# Altium PCB PCB1.PcbDoc
Units mm, origin at the board's own origin, x right, y up, seen from the top; angles counter-clockwise.
Board outline 125.1 x 125.73 mm, 2 copper layers (Top Layer, Bottom Layer); 25 components, 28 nets, 163 pads, 0 vias.
Unrouted connection lines stored in the file: 1.
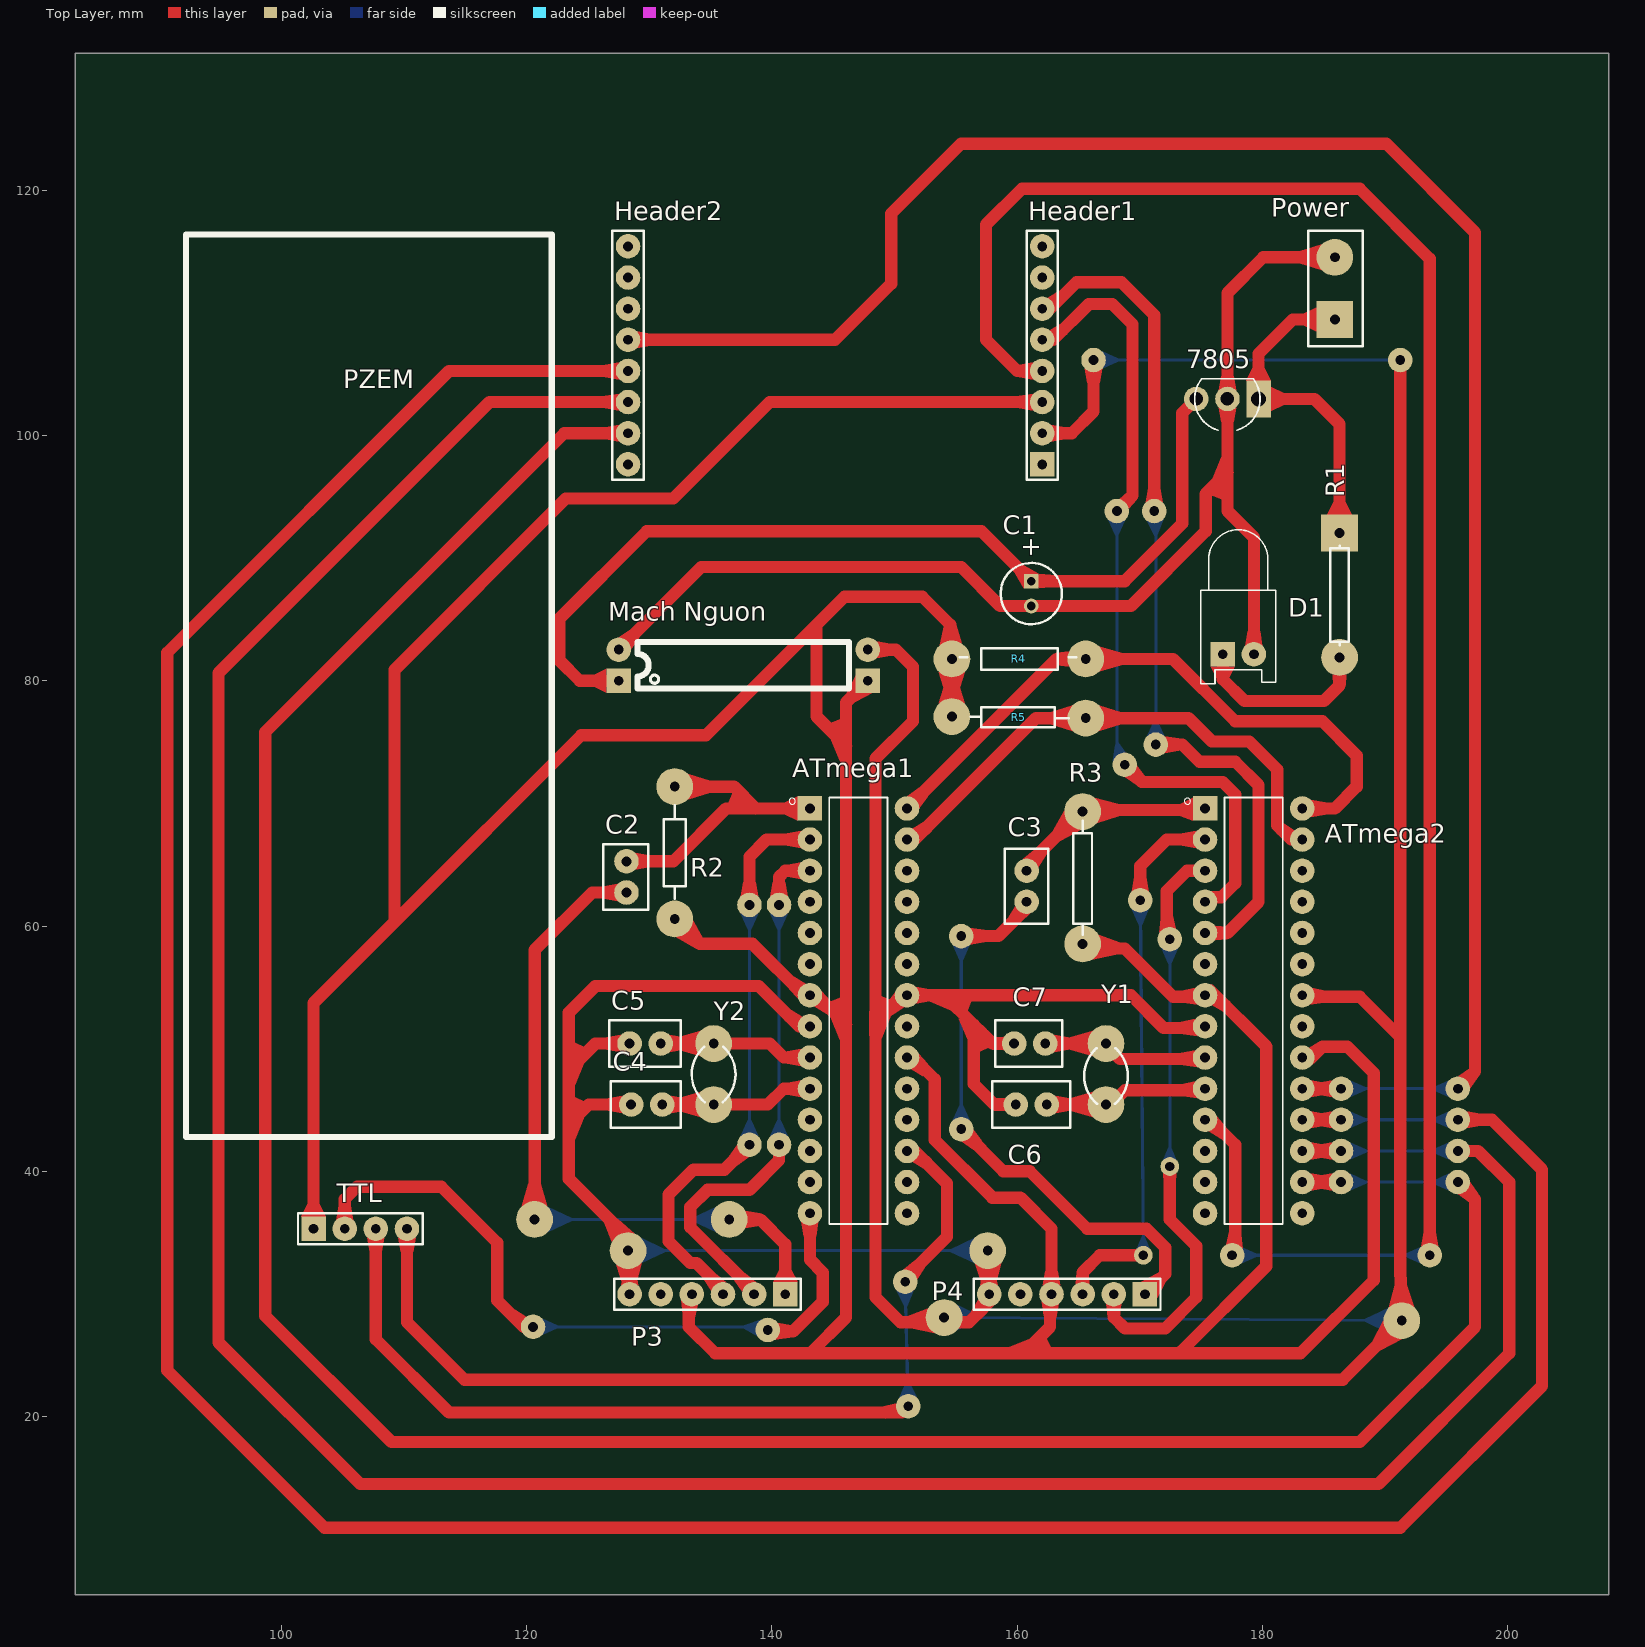
[diagram p0: Top Layer view]
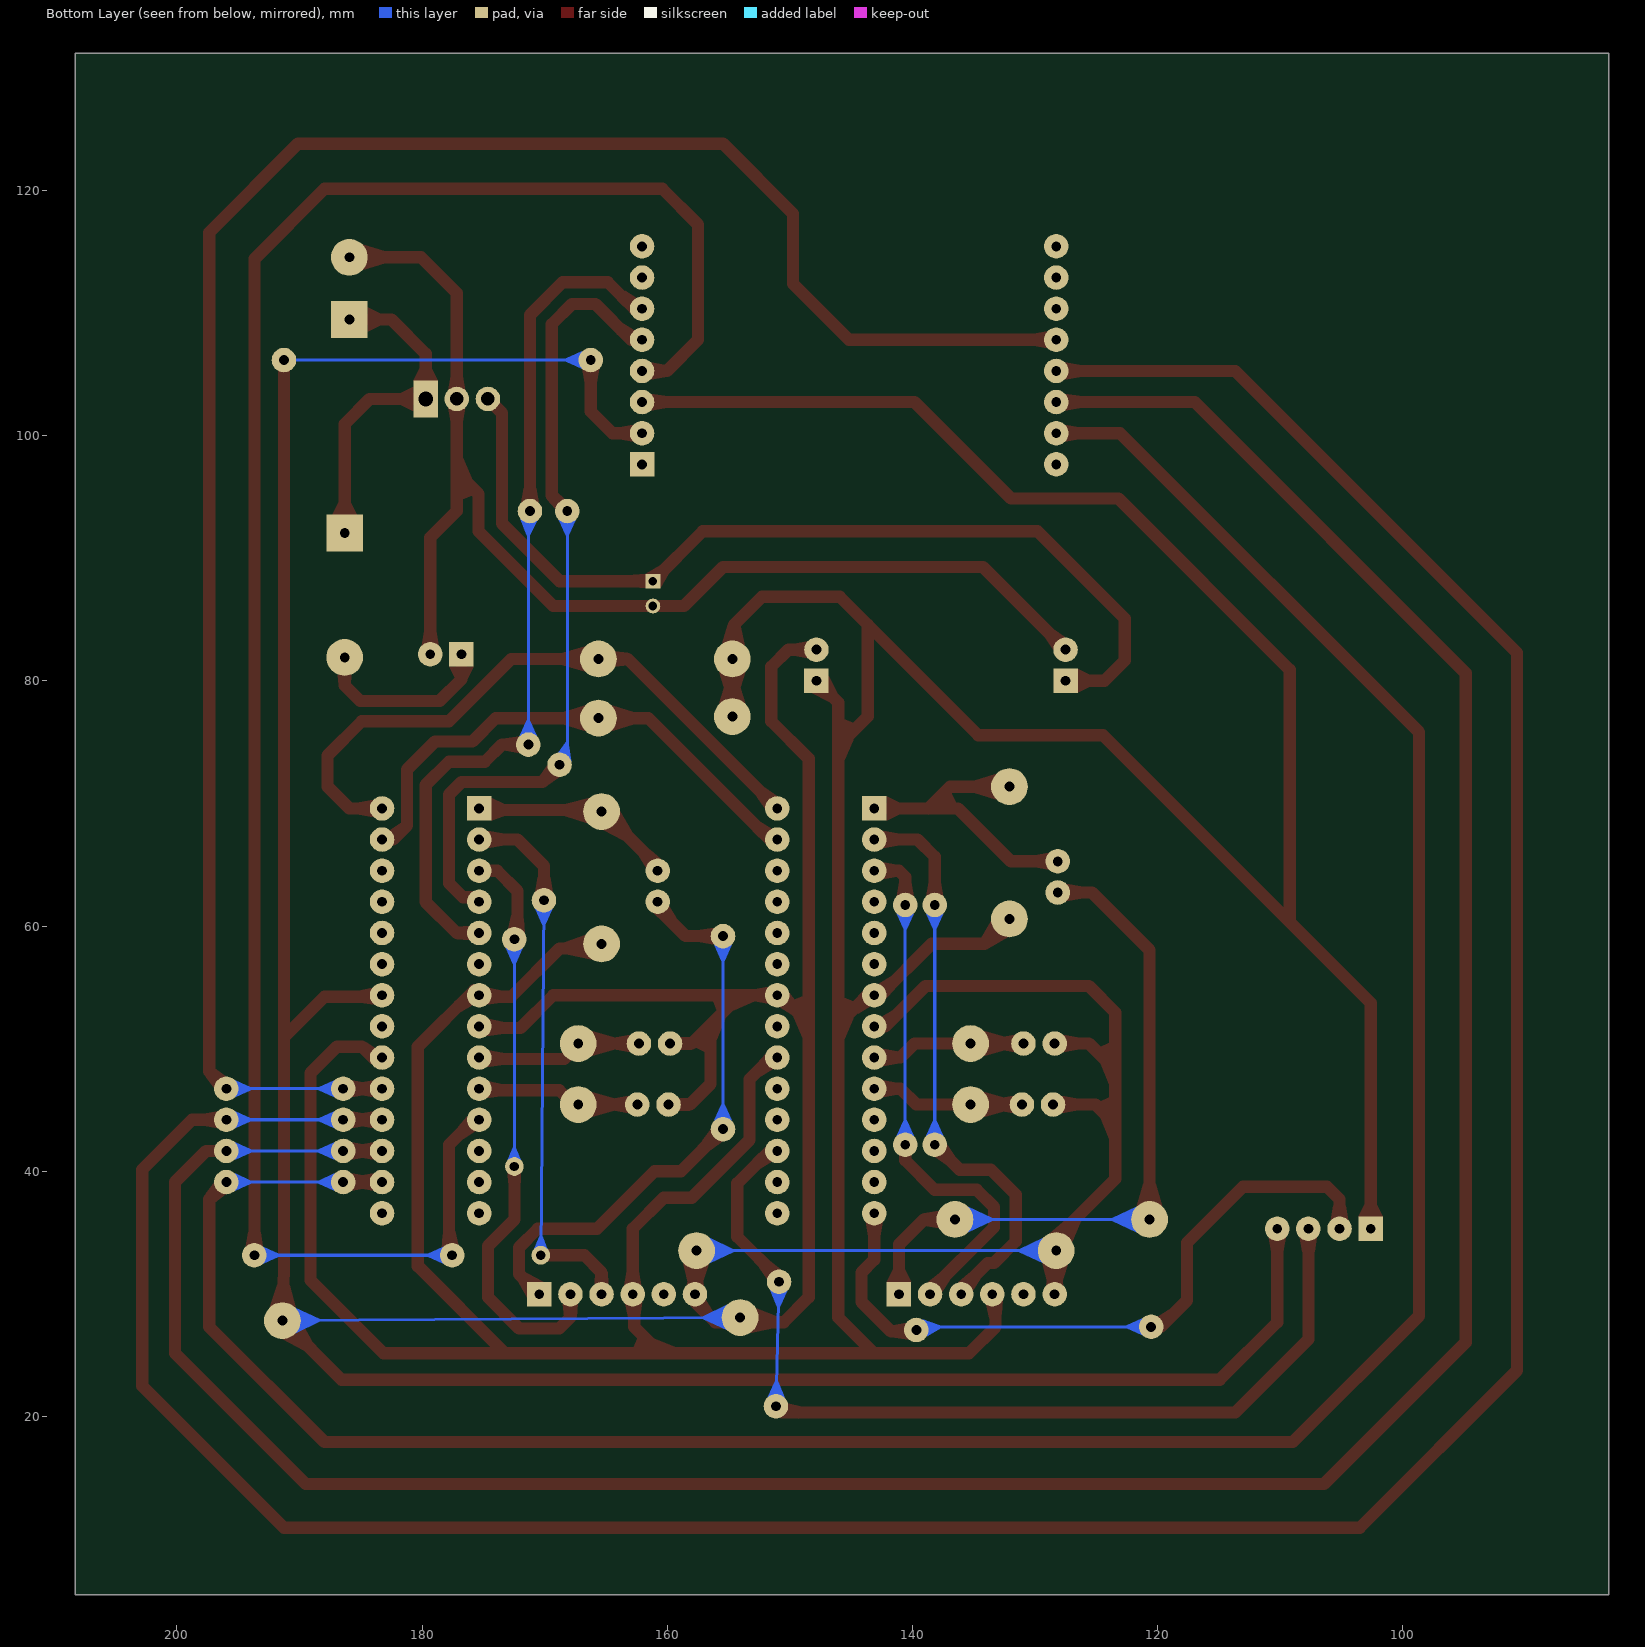
[diagram p1: Bottom Layer view, seen from below]

## Layer stack, top to bottom
Top Solder: solder mask 0.0102, Solder Resist, Dk 3.5
Top Layer: signal copper 0.0356
Dielectric 1: dielectric 0.32, FR-4, Dk 4.8
Bottom Layer: signal copper 0.0356
Bottom Solder: solder mask 0.0102, Solder Resist, Dk 3.5

## Board outline
83.185,5.461 208.28,5.461 208.28,19.558 208.28,131.191 83.185,131.191 83.185,127.762

## Design rules (kind name [scope] priority, off if disabled: settings)
Clearance [All] p1: gap=0.3 ignorepadtopadclearanceinfootprint=FALSE
PolygonConnect [All] p1: connectstyle=Relief reliefconductorwidth=0.254 reliefentries=4 polygonreliefangle="90 Angle" airgapwidth=0.254
RoutingVias [All] p1: holewidth=0.711 width=1.27 viastyle="Through Hole" minholewidth=0.711 minwidth=1.27 maxholewidth=0.711 maxwidth=1.27
SolderMaskExpansion [All] p1: expansion=0.102
Width [All] p1: maxlimit=1 minlimit=0.254 preferedwidth=1
30 further rules are at their usual default settings.

## Components (designator, comment, footprint, x,y, rotation, side; value= is the part's Value field where it differs from the comment)
7805 "LM7805" TO92- 177.165,102.997 r180 top (schematic designator U1)
ATmega1 "ATmega328P" DIP794W46P254L2967H457Q28B 147.066,53.086 r0 top
ATmega2 "ATmega328P" DIP794W46P254L2967H457Q28B 179.301,53.086 r0 top
C1 "Cap Pol1" RB7.6-15 161.163,86.995 r90 top value=10uF
C2 "Cap" RAD-0.3#1 128.143,66.548 r270 top value=100nF
C3 "Cap3" RAD-0.3#2 160.655,61.722 r270 top value=100nF
C4 "Cap" RAD-0.3#3 131.699,45.44 r0 top value=22pF
C5 "Cap" RAD-0.3#4 132.207,50.419 r0 top value=22pF
C6 "Cap" RAD-0.3#4 163.703,45.44 r0 top value=22pF
C7 "Cap" RAD-0.3#5 163.83,50.419 r0 top value=22pF
D1 "LED0" LED-0 178.054,82.169 r180 top
Header1 "" HDR1X8#1 162.052,97.663 r90 top
Header2 "" HDR1X8#2 128.27,97.663 r90 top
"Mach Nguon" "Mach Nguon 3.3V" PCBComponent_1 146.177,77.47 r90 top
P3 "FT232RL1" HDR1X6 141.097,29.972 r180 top
P4 "FT232RL2" HDR1X6 170.434,29.972 r180 top
Power "12-15 (V)" HDR1X2 185.928,112.141 r270 top (schematic designator P1)
R1 "Res1" AXIAL-0.3#1 186.309,88.265 r90 top value=470
R2 "Res1" AXIAL-0.3#2 132.08,67.564 r270 top value=10K
R3 "Res1" AXIAL-0.3#3 165.354,64.135 r270 top value=10K
R4 "Res1" AXIAL-0.3#4 158.496,81.915 r0 top value=10K
R5 "Res1" AXIAL-0.3#5 160.528,77.089 r0 top value=10K
TTL "Header 4" HDR1X4 102.616,35.306 r0 top (schematic designator P2)
Y1 "16 MHz" R38 167.259,46.99 r0 top
Y2 "16 MHz" R38 135.255,46.99 r0 top

## Footprints (in the part's own frame and the unit in brackets; to place one, negate y for a bottom-side part, rotate by r counter-clockwise, add the part's x,y. Pads: shape width x height; smd on the part's side, far side on the other; paste and mask are expansions set on the pad)
AXIAL-0.3#1 [mm] "Axial Device, Thru-Hole; 2 Leads; 0.3 in Pin Spacing"
  round 3 hole 0.8: 1(-6.35,0)
  rect 3x3 hole 0.8: 2(3.81,0)
  silkscreen extent -5.36,-0.76 2.77,0.76
AXIAL-0.3#2 [mm] "Axial Device, Thru-Hole; 2 Leads; 0.3 in Pin Spacing"
  round 3 hole 0.8: 1(-3.81,0) 2(6.985,0)
  silkscreen extent -2.29,-0.89 5.33,0.89
AXIAL-0.3#3 [mm] "Axial Device, Thru-Hole; 2 Leads; 0.3 in Pin Spacing"
  round 3 hole 0.8: 1(-5.207,0) 2(5.588,0)
  silkscreen extent -4.44,-0.76 4.83,0.76
AXIAL-0.3#4 [mm] "Axial Device, Thru-Hole; 2 Leads; 0.3 in Pin Spacing"
  round 3 hole 0.8: 1(-3.81,-0.127) 2(7.112,-0.127)
  silkscreen extent -3.17,-1.02 6.35,0.76
AXIAL-0.3#5 [mm] "Axial Device, Thru-Hole; 2 Leads; 0.3 in Pin Spacing"
  round 3 hole 0.8: 1(-5.842,0) 2(5.08,-0.127)
  silkscreen extent -4.32,-0.89 3.68,0.76
DIP794W46P254L2967H457Q28B [mm]
  rect 2x2 hole 0.8: 1(-3.96,16.51)
  round 2 hole 0.8: 2(-3.96,13.97) 3(-3.96,11.43) 4(-3.96,8.89) 5(-3.96,6.35) 6(-3.96,3.81) 7(-3.96,1.27) 8(-3.96,-1.27) 9(-3.96,-3.81) 10(-3.96,-6.35) 11(-3.96,-8.89) 12(-3.96,-11.43) 13(-3.96,-13.97) 14(-3.96,-16.51) 15(3.96,-16.51) 16(3.96,-13.97) 17(3.96,-11.43) 18(3.96,-8.89) 19(3.96,-6.35) 20(3.96,-3.81) 21(3.96,-1.27) 22(3.96,1.27) 23(3.96,3.81) 24(3.96,6.35) 25(3.96,8.89) 26(3.96,11.43) 27(3.96,13.97) 28(3.96,16.51)
  silkscreen extent -5.65,-17.4 2.38,17.4
HDR1X2 [mm] "Connector; Header; 2 Position"
  round 3 hole 0.8: 1(-2.413,0)
  rect 3x3 hole 0.8: 2(2.667,0)
  silkscreen extent -4.57,-2.16 4.83,2.29
HDR1X4 [mm] "Connector; Header; 4 Position"
  rect 2x2 hole 0.8: 1(0,0)
  round 2 hole 0.8: 2(2.54,0) 3(5.08,0) 4(7.62,0)
  silkscreen extent -1.27,-1.27 8.89,1.27
HDR1X6 [mm] "Connector; Header; 6 Position"
  rect 2x2 hole 0.8: 1(0,0)
  round 2 hole 0.8: 2(2.54,0) 3(5.08,0) 4(7.62,0) 5(10.16,0) 6(12.7,0)
  silkscreen extent -1.27,-1.27 13.97,1.27
HDR1X8#1 [mm] "Connector; Header; 8 Position"
  rect 2x2 hole 0.8: 1(0,0)
  round 2 hole 0.8: 2(2.54,0) 3(5.08,0) 4(7.62,0) 5(10.16,0) 6(12.7,0) 7(15.24,0) 8(17.78,0)
  silkscreen extent -1.27,-1.27 19.05,1.27
HDR1X8#2 [mm] "Connector; Header; 8 Position"
  round 2 hole 0.8: 1(0,0) 2(2.54,0) 3(5.08,0) 4(7.62,0) 5(10.16,0) 6(12.7,0) 7(15.24,0) 8(17.78,0)
  silkscreen extent -1.27,-1.27 19.05,1.27
LED-0 [mm] "LED; 2 Leads"
  rect 2x2 hole 0.8: 1(1.27,0)
  round 2 hole 0.8: 2(-1.27,0)
  silkscreen extent -3.05,-10.16 3.05,2.41
PCBComponent_1 [mm]
  rect 2x2 hole 0.8: 1(2.54,18.669) 3(2.54,-1.651)
  round 2 hole 0.8: 2(5.08,18.669) 4(5.08,-1.651)
  silkscreen extent 1.9,-0.13 5.71,17.14
R38 [mm] "Crystal, Thru-Hole; 2 Leads; Body 3.1 x 8.2 mm (Dia.xH)"
  round 3 hole 0.8: 1(0,3.429) 2(0,-1.55)
  silkscreen extent -1.78,-1.49 1.78,3.05
RAD-0.3#1 [mm] "Radial Cap, Thru-Hole; 2 Leads; 0.3 in Pin Spacing"
  round 2 hole 0.8: 1(1.27,0) 2(3.81,0)
  silkscreen extent -0.13,-1.91 5.21,1.78
RAD-0.3#2 [mm] "Radial Cap, Thru-Hole; 2 Leads; 0.3 in Pin Spacing"
  round 2 hole 0.8: 1(-2.794,0.127) 2(-0.254,0.127)
  silkscreen extent -4.57,-1.65 1.52,1.91
RAD-0.3#3 [mm] "Radial Cap, Thru-Hole; 2 Leads; 0.3 in Pin Spacing"
  round 2 hole 0.8: 1(-3.175,0) 2(-0.635,0)
  silkscreen extent -4.83,-1.91 0.89,1.91
RAD-0.3#4 [mm] "Radial Cap, Thru-Hole; 2 Leads; 0.3 in Pin Spacing"
  round 2 hole 0.8: 1(-3.81,0) 2(-1.27,0)
  silkscreen extent -5.46,-1.91 0.38,1.91
RAD-0.3#5 [mm] "Radial Cap, Thru-Hole; 2 Leads; 0.3 in Pin Spacing"
  round 2 hole 0.8: 1(-4.064,0) 2(-1.524,0)
  silkscreen extent -5.59,-1.91 -0.13,1.91
RB7.6-15 [mm] "Polarized Capacitor (Radial); 2 Leads"
  rect 1.2x1.2 hole 0.7: 1(1.143,0)
  round 1.2 hole 0.7: 2(-0.889,0)
  silkscreen extent -2.37,-2.5 2.63,2.5
TO92- [mm]
  rect 2x3 hole 1.2: 1(-2.54,0)
  round 2 hole 1.1: 2(0,0) 3(2.54,0)
  silkscreen extent -2.66,-1.65 2.66,2.55

## Part data
7805: "IC REG LIN 5V 1A"
C1: "Polarized Capacitor (Radial)", LatestRevisionDate=17-Jul-2002, LatestRevisionNote="Re-released for DXP Platform.", PackageDescription="Polarized Capacitor (Radial); 2 Leads", PackageReference=RB7.6-15, Published=8-Jun-2000, Publisher="Altium Limited"
C2 C4 C5 C6 C7: "Capacitor", LatestRevisionDate=17-Jul-2002, LatestRevisionNote="Re-released for DXP Platform.", PackageDescription="Radial Cap, Thru-Hole; 2 Leads; 0.3 in Pin Spacing", PackageReference=RAD-0.3, Published=8-Jun-2000, Publisher="Altium Limited"
C3: library part Cap, "Capacitor", LatestRevisionDate=17-Jul-2002, LatestRevisionNote="Re-released for DXP Platform.", PackageDescription="Radial Cap, Thru-Hole; 2 Leads; 0.3 in Pin Spacing", PackageReference=RAD-0.3, Published=8-Jun-2000, Publisher="Altium Limited"
D1: "Typical INFRARED GaAs LED", LatestRevisionDate=08-Jul-2005, LatestRevisionNote="Mech Layer 1 removed.", PackageDescription="LED; 2 Leads", PackageReference=LED-0, Published=8-Jun-2000, Publisher="Altium Limited"
Header1 Header2: library part "Header 8", "Header, 8-Pin", LatestRevisionDate=17-Jul-2002, LatestRevisionNote="Re-released for DXP Platform.", Publisher="Altium Limited"
"Mach Nguon": library part Component_1
P3 P4: library part "Header 6", "Header, 6-Pin", LatestRevisionDate=17-Jul-2002, LatestRevisionNote="Re-released for DXP Platform.", Publisher="Altium Limited"
Power: library part "Header 2", "Header, 2-Pin", LatestRevisionDate=17-Jul-2002, LatestRevisionNote="Re-released for DXP Platform.", Publisher="Altium Limited"
R1 R2 R3 R4 R5: "Resistor", LatestRevisionDate=17-Jul-2002, LatestRevisionNote="Re-released for DXP Platform.", PackageDescription="Axial Device, Thru-Hole; 2 Leads; 0.3 in Pin Spacing", PackageReference=AXIAL-0.3, Published=8-Jun-2000, Publisher="Altium Limited"
TTL: "Header, 4-Pin", LatestRevisionDate=17-Jul-2002, LatestRevisionNote="Re-released for DXP Platform.", Publisher="Altium Limited"
Y1 Y2: library part XTAL, "Crystal Oscillator", LatestRevisionDate=17-Jul-2002, LatestRevisionNote="Re-released for DXP Platform.", PackageDescription="Crystal, Thru-Hole; 2 Leads; Body 3.1 x 8.2 mm (Dia.xH)", PackageReference=R38, Published=8-Jun-2000, Publisher="Altium Limited"

## Free pads (board coordinates)
  round 3 hole 0.8: 2(157.607,33.528) 3(128.27,33.528) 4(154.051,28.067) 5(191.389,27.813) 6(120.65,36.068) 7(136.525,36.068)
  round 2 hole 0.8: 8(140.589,61.722) 9(138.176,61.722) 10(140.589,42.164) 11(138.176,42.164) 12(139.674,27.051) 13(120.523,27.305) 14(150.876,30.988) 15(151.13,20.828) 16(155.448,59.182) 17(155.448,43.434) 18(172.466,58.928) 19(170.053,62.103) 22(168.783,73.152) 23(171.323,74.803) 24(171.196,93.853) 25(168.148,93.853) 26(177.546,33.147) 27(193.675,33.147) 28(186.436,46.736) 29(186.436,44.196) 30(186.436,41.656) 31(186.436,39.116) 32(195.961,46.736) 33(195.961,44.196) 34(195.961,41.656) 35(195.961,39.116) 36(166.243,106.172) 37(191.262,106.172)
  round 1.524 hole 0.762: 20(172.466,40.386) 21(170.307,33.147)

## Nets (pads, with @x,y where several pads share a name; then routed paths per layer and width w, separated by ;. In a path a pad name is that pad's centre, name@x,y a point inside that pad or via, vN(x,y) a via of type N, cw(c..) or ccw(c..) an arc to the next point about the centre after c; other vN are vias at no path point)
1a: ATmega1.1 C2.1 R2.1 | length 24.1
  Top Layer w1: C2.1 131.953,65.278 136.271,69.596 138.684,69.596 ; R2.1 136.906,71.374 138.684,69.596 ; ATmega1.1 138.811,69.596 138.684,69.596
1b: ATmega2.1 C3.1 R3.1 | length 16.9
  Top Layer w1: C3.1 160.782,64.897 165.354,69.469 175.214,69.469 ATmega2.1
3.3V: "Mach Nguon.3" ATmega1.7 ATmega1.20 ATmega2.7 ATmega2.20 Header1.3 P3.4 P4.4 R2.2 R3.2 R4.1 R5.1 TTL.1 | length 423.9
  Top Layer w1: TTL.1 102.616,53.721 109.22,60.325 ; R2.2 134.112,58.547 138.43,58.547 142.621,54.356 ATmega1.7 143.637,54.356 146.05,51.943 ; P3.4 133.223,29.718 133.223,27.305 135.382,25.146 160.528,25.146 ; 143.181,25.198 146.05,28.067 146.05,51.943 ; 147.828,80.01 146.05,78.232 146.05,74.676 ; ATmega1.20 151.511,49.276 153.289,47.498 153.289,42.545 157.988,37.846 160.274,37.846 162.814,35.306 P4.4 162.687,29.845 162.687,27.305 160.528,25.146 ; R5.1 R4.1 154.559,81.915 154.559,84.582 152.273,86.868 145.923,86.868 143.637,84.582 ; Header1.3 139.827,102.743 131.953,94.869 123.19,94.869 109.22,80.899 109.22,60.325 ; R3.2@165.354,57.912 165.608,58.166 168.783,58.166 172.72,54.229 ATmega2.7@175.341,54.229 ; 173.355,25.273 180.34,32.258 180.34,50.165 ATmega2.7@175.745,54.76 ; ATmega2.20@183.261,49.149 183.896,49.149 184.912,50.165 186.944,50.165 189.103,48.006 189.103,31.115 183.134,25.146 160.528,25.146 ; 109.22,60.325 124.46,75.565 134.62,75.565 143.637,84.582 ; 143.637,84.582 143.637,77.089 146.05,74.676 ; 146.05,51.943 146.05,74.676
+: 7805.1 Power.2 R1.2 | length 27.9
  Top Layer w1: R1.2@185.928,92.456 R1.2 186.309,100.965 184.277,102.997 7805.1 179.705,106.68 182.499,109.474 Power.2
DIO0: ATmega2.4 Header1.5 pad.22 pad.25 | length 66.3
  Top Layer w1: Header1.5 162.941,107.823 165.862,110.744 167.767,110.744 169.418,109.093 169.418,95.123 pad.25 ; pad.22 170.18,71.755 176.784,71.755 177.8,70.739 177.8,63.5 176.657,62.357 175.722,62.357 ATmega2.4
  Bottom Layer w0.254: pad.25 168.148,73.787 pad.22
DIO1: ATmega2.5 Header1.6 pad.23 pad.24 | length 70.9
  Top Layer w1: Header1.6 162.687,110.363 164.846,112.522 168.529,112.522 171.196,109.855 pad.24 ; pad.23 173.482,74.803 174.879,73.406 177.8,73.406 179.705,71.501 179.705,61.976 177.165,59.436 ATmega2.5
  Bottom Layer w0.254: pad.24 171.323,93.726 pad.23
DTR1: C2.2 P3.1 pad.6 pad.7 | length 56.8
  Top Layer w1: pad.6 120.65,58.039 125.349,62.738 C2.2 ; pad.7 139.065,36.068 141.097,34.036 P3.1
  Bottom Layer w0.254: pad.6 pad.7
DTR2: C3.2 P4.1 pad.16 pad.17 | length 47.7
  Top Layer w1: pad.17 158.877,40.005 161.036,40.005 165.735,35.306 170.561,35.306 172.085,33.782 172.085,31.623 P4.1 ; pad.16 158.496,59.182 160.782,61.468 C3.2
  Bottom Layer w0.254: pad.17 pad.16
GND: 7805.2 "Mach Nguon.2" "Mach Nguon.4" ATmega1.8 ATmega1.22 ATmega2.8 ATmega2.22 C1.2 C4.1 C5.1 C6.1 C7.1 D1.2 Header1.2 P3.6 P4.6 pad.2 pad.3 pad.4 pad.5 pad.36 pad.37 Power.1 TTL.4 | length 557.6
  Top Layer w1: TTL.4 110.236,27.686 114.935,22.987 186.563,22.987 pad.5 191.262,32.089 191.262,50.927 ; 127.508,82.55 134.239,89.281 155.448,89.281 158.623,86.106 C1.2 169.291,86.106 175.387,92.202 175.387,95.25 177.165,97.028 ; P3.6 128.397,33.401 pad.3 128.27,34.544 123.444,39.37 123.444,43.815 ; C5.1 125.603,50.419 123.444,48.26 ; C4.1 125.069,45.44 123.444,43.815 ; ATmega1.8 142.24,51.816 138.938,55.118 125.603,55.118 123.444,52.959 123.444,48.26 ; 147.828,82.55 150.114,82.55 151.511,81.153 151.511,76.708 148.463,73.66 148.463,52.07 ; pad.2 157.734,30.353 P4.6 157.734,29.337 156.083,27.686 150.495,27.686 148.463,29.718 148.463,52.07 ; C7.1 157.988,50.419 156.464,51.943 ; C6.1 158.141,45.44 156.464,47.117 156.464,51.943 ; Header1.2 164.465,100.203 166.243,101.981 pad.36 ; ATmega2.8 175.214,51.689 171.958,51.689 169.291,54.356 154.051,54.356 ; D1.2 179.324,91.694 177.165,93.853 177.165,97.028 ; ATmega2.22@183.261,54.229 187.96,54.229 191.262,50.927 ; Power.1 180.086,114.554 177.165,111.633 7805.2 177.165,97.028 ; pad.37 191.262,105.918 191.262,81.407 191.262,50.927 ; 123.444,43.815 123.444,48.26 ; 148.463,52.07 150.888,54.495 ATmega1.22 154.051,54.356 ; 154.051,54.356 156.464,51.943
  Bottom Layer w0.254: pad.3 pad.2 ; pad.4 pad.5 ; pad.36 189.738,106.172 pad.37
MISO: ATmega2.18 Header2.4 pad.29 pad.33 | length 266.8
  Top Layer w1: Header2.4 113.665,105.283 90.678,82.296 90.678,23.749 103.505,10.922 191.262,10.922 202.819,22.479 202.819,40.132 198.755,44.196 pad.33 ; ATmega2.18 pad.29
  Bottom Layer w0.254: pad.29 pad.33
MOSI: ATmega2.17 Header2.3 pad.30 pad.34 | length 243.6
  Top Layer w1: Header2.3 116.967,102.743 94.869,80.645 94.869,26.035 106.426,14.478 189.484,14.478 200.152,25.146 200.152,39.116 197.612,41.656 pad.34 ; ATmega2.17 pad.30
  Bottom Layer w0.254: pad.30 pad.34
NetC1_1: 7805.3 "Mach Nguon.1" C1.1 | length 76.9
  Top Layer w1: 127.508,80.01 124.333,80.01 122.682,81.661 122.682,85.09 129.794,92.202 157.099,92.202 C1.1 168.783,88.138 173.482,92.837 173.482,101.854 7805.3
NetD1_1: D1.1 R1.1 | length 15.1
  Top Layer w1: D1.1 176.784,80.137 178.562,78.359 185.039,78.359 186.309,79.629 R1.1
NSS: ATmega2.16 Header2.2 pad.31 pad.35 | length 219.2
  Top Layer w1: Header2.2 123.063,100.203 98.679,75.819 98.679,28.194 108.966,17.907 187.96,17.907 197.358,27.305 197.358,37.719 pad.35 ; ATmega2.16 pad.31
  Bottom Layer w0.254: pad.31 pad.35
RST: ATmega2.11 Header1.4 pad.26 pad.27 | length 164.6
  Top Layer w1: Header1.4 160.02,105.283 157.48,107.823 157.48,117.221 160.401,120.142 187.96,120.142 193.675,114.427 pad.27 ; ATmega2.11 175.768,44.196 177.8,42.164 177.8,33.401 pad.26
  Bottom Layer w0.254: pad.26 pad.27
RX: ATmega1.14 pad.12 pad.13 TTL.2 | length 58.1
  Top Layer w1: TTL.2 105.156,37.719 106.172,38.735 113.03,38.735 117.602,34.163 117.602,29.464 119.761,27.305 pad.13 ; pad.12 139.801,26.924 141.732,26.924 144.145,29.337 144.145,31.75 143.106,32.789 ATmega1.14
  Bottom Layer w0.254: pad.13 139.42,27.305 pad.12
RX1: ATmega1.3 P3.2 pad.8 pad.10 | length 43.9
  Top Layer w1: P3.2 138.557,30.226 133.35,35.433 133.35,37.084 134.747,38.481 138.176,38.481 140.589,40.894 pad.10 ; pad.8 140.589,64.008 141.097,64.516 ATmega1.3
  Bottom Layer w0.254: pad.10 pad.8
RX2: ATmega2.3 P4.2 pad.18 pad.20 | length 48
  Top Layer w1: P4.2 167.894,28.093 168.809,27.178 172.085,27.178 174.625,29.718 174.625,33.909 172.466,36.068 pad.20 ; pad.18 172.212,59.182 172.212,62.865 173.863,64.516 ATmega2.3
  Bottom Layer w0.254: pad.20 pad.18
SCK: ATmega2.19 Header2.5 pad.28 pad.32 | length 165.2
  Top Layer w1: Header2.5 145.161,107.823 149.733,112.395 149.733,118.11 155.448,123.825 190.119,123.825 197.358,116.586 197.358,49.403 197.358,48.133 pad.32 ; ATmega2.19 pad.28
  Bottom Layer w0.254: pad.28 pad.32
SCL: ATmega1.28 ATmega2.28 R4.2 | length 53.1
  Top Layer w0.254: ATmega2.28 ATmega2.28@183.261,69.977
  Top Layer w1: ATmega1.28 163.218,81.788 R4.2 172.72,81.788 177.8,76.708 184.912,76.708 187.706,73.914 187.706,71.374 185.928,69.596 ATmega2.28
SDA: ATmega1.27 ATmega2.27 R5.2 | length 43.1
  Top Layer w1: ATmega1.27 151.638,67.056 161.544,76.962 R5.2 173.99,76.962 175.895,75.057 178.943,75.057 181.229,72.771 181.229,68.199 182.372,67.056 ATmega2.27
TX: ATmega1.17 pad.14 pad.15 TTL.3 | length 79.1
  Top Layer w1: TTL.3 107.696,26.289 113.665,20.32 150.622,20.32 pad.15 ; pad.14 150.876,31.242 154.284,34.65 154.284,39.01 151.638,41.656 ATmega1.17
  Bottom Layer w0.254: pad.14 pad.15
TX1: ATmega1.2 P3.3 pad.9 pad.11 | length 47.6
  Top Layer w1: P3.3 136.017,30.353 133.858,32.512 133.35,32.512 131.572,34.29 131.572,38.1 133.604,40.132 136.144,40.132 pad.11 ; pad.9 138.176,65.659 139.573,67.056 ATmega1.2
  Bottom Layer w0.254: pad.11 pad.9
TX2: ATmega2.2 P4.3 pad.19 pad.21 | length 45.2
  Top Layer w1: P4.3 165.354,31.75 166.751,33.147 pad.21 ; pad.19 170.053,64.897 172.212,67.056 ATmega2.2
  Bottom Layer w0.254: pad.19 pad.21
XTAL1: ATmega2.9 C7.2 Y1.1 | length 13.3
  Top Layer w0.254: C7.2@162.56,50.038 C7.2@162.941,50.419
  Top Layer w1: C7.2@162.941,50.419 Y1.1 ; Y1.1@167.386,50.165 168.402,49.149 175.214,49.149 ATmega2.9
XTAL2: ATmega2.10 C6.2 Y1.2 | length 13.4
  Top Layer w0.254: C6.2@162.56,45.085 C6.2@162.915,45.44
  Top Layer w1: C6.2@162.915,45.44 Y1.2 ; Y1.2@167.386,45.186 168.809,46.609 175.214,46.609 ATmega2.10
XTAL3: ATmega1.9 C5.2 Y2.1 | length 12.6
  Top Layer w1: C5.2 137.16,50.419 139.827,50.419 140.97,49.276 ATmega1.9
XTAL4: ATmega1.10 C4.2 Y2.2 | length 12.6
  Top Layer w1: C4.2 137.16,45.44 139.674,45.44 140.97,46.736 ATmega1.10
pads on no net: ATmega1.4 ATmega1.5 ATmega1.6 ATmega1.11 ATmega1.12 ATmega1.13 ATmega1.15 ATmega1.16 ATmega1.18 ATmega1.19 ATmega1.21 ATmega1.23 ATmega1.24 ATmega1.25 ATmega1.26 ATmega2.6 ATmega2.12 ATmega2.13 ATmega2.14 ATmega2.15 ATmega2.21 ATmega2.23 ATmega2.24 ATmega2.25 ATmega2.26 Header1.1 Header1.7 Header1.8 Header2.1 Header2.6 Header2.7 Header2.8 P3.5 P4.5

## Silkscreen, mask and mechanical layers (free items; w line width, h text height)
Top Overlay:
  lines w0.2: 131.191,68.707 132.969,68.707
  lines w0.5: 92.202,42.799 92.202,116.399 122.047,116.399 122.047,42.799 92.202,42.799
  text "PZEM" at 105.029,103.886 h1.52

## Text inside footprints (layer, text, board x,y; h text height)
C1: Top Overlay "+" at 161.798,90.043 h1.5 r90